# Altium PCB N-watch_3.1.PcbDoc
Units mil, origin at the board's own origin, x right, y up, seen from the top; angles counter-clockwise.
Board outline 1400 x 1375 mil, 2 copper layers (Top Layer, Bottom Layer); 47 components, 47 nets, 212 pads, 99 vias.
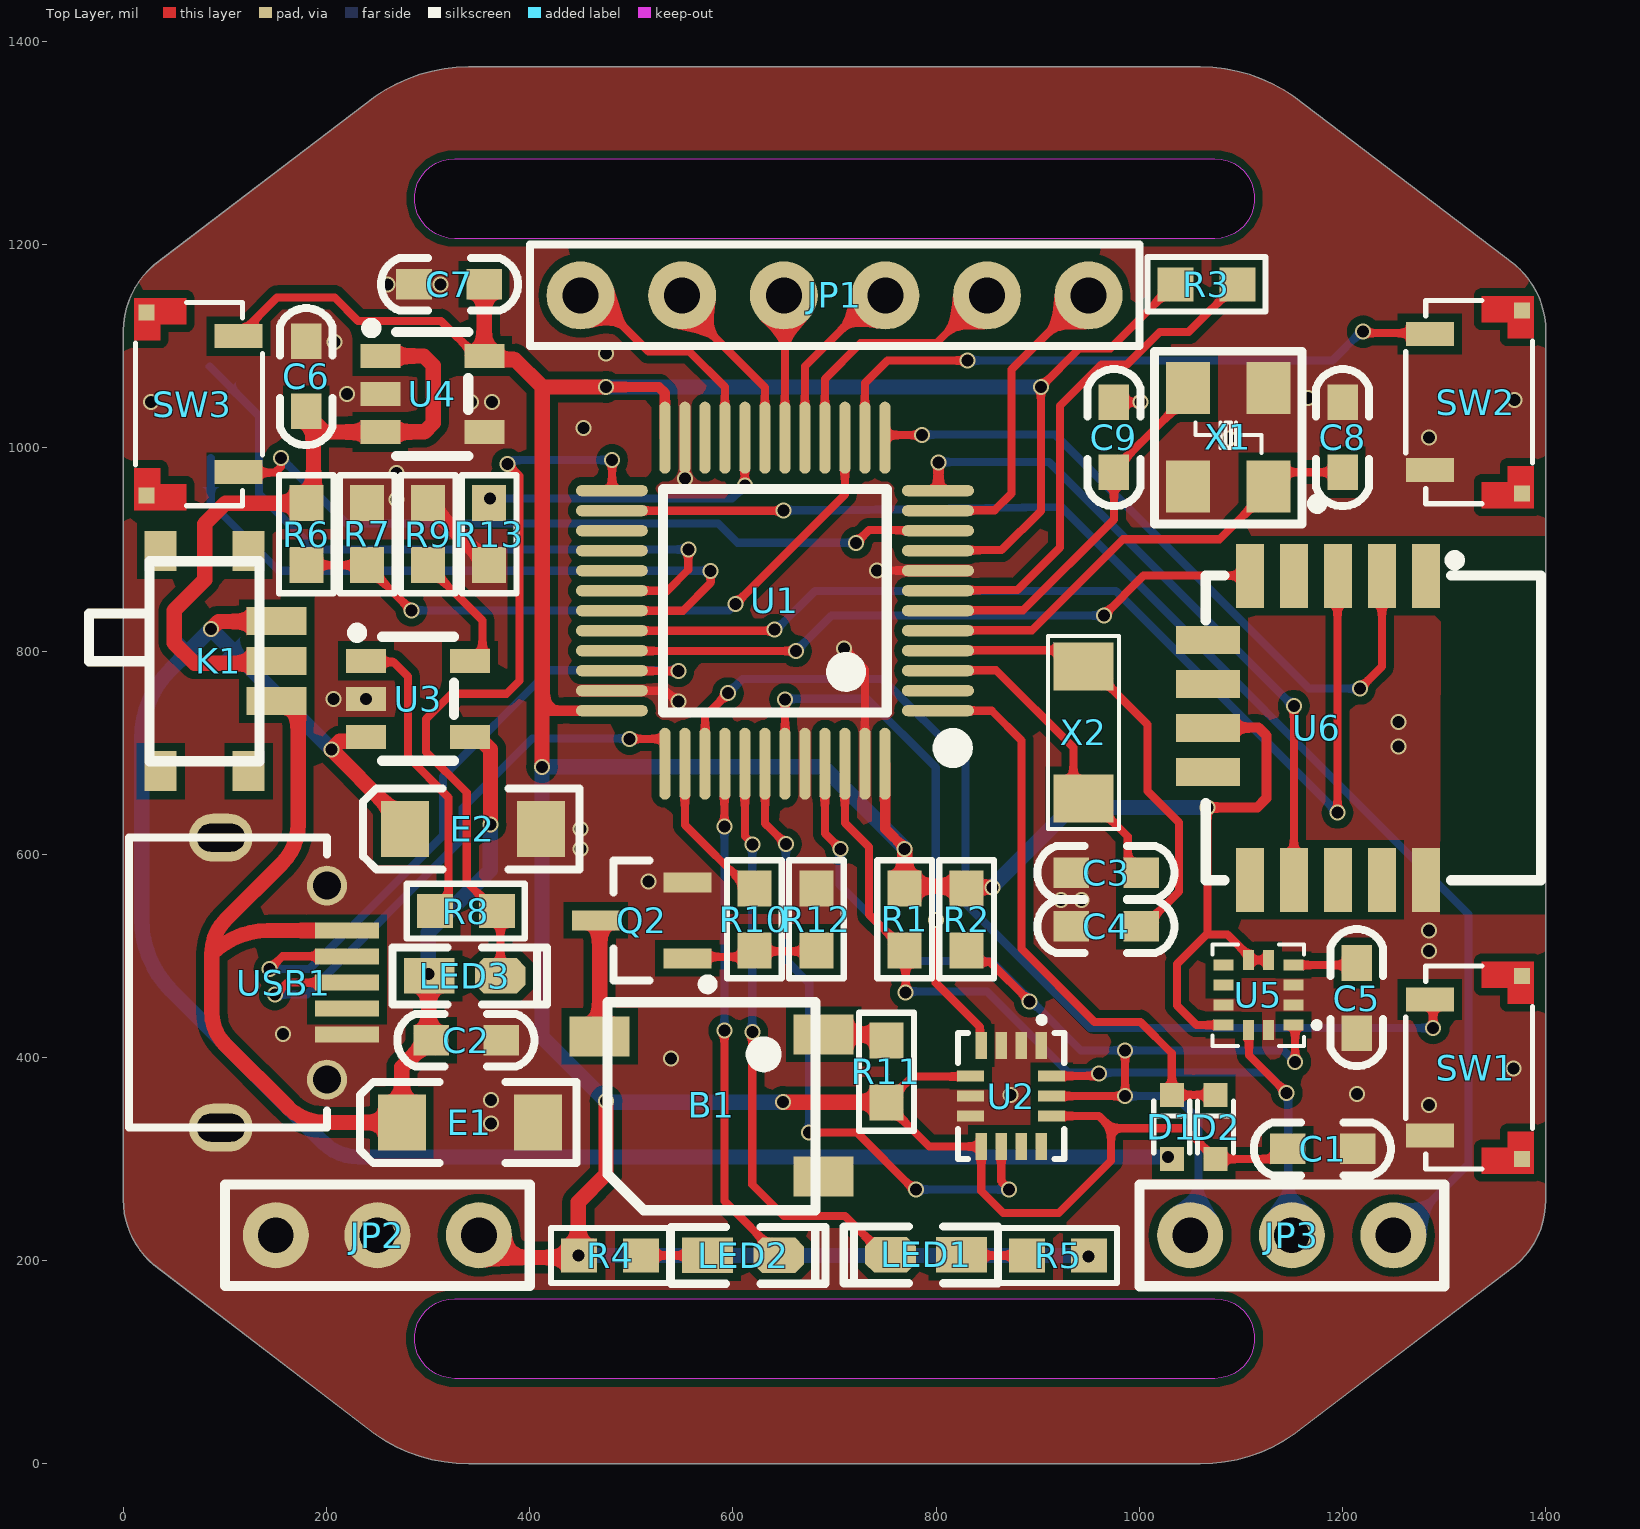
[diagram p0: Top Layer view]
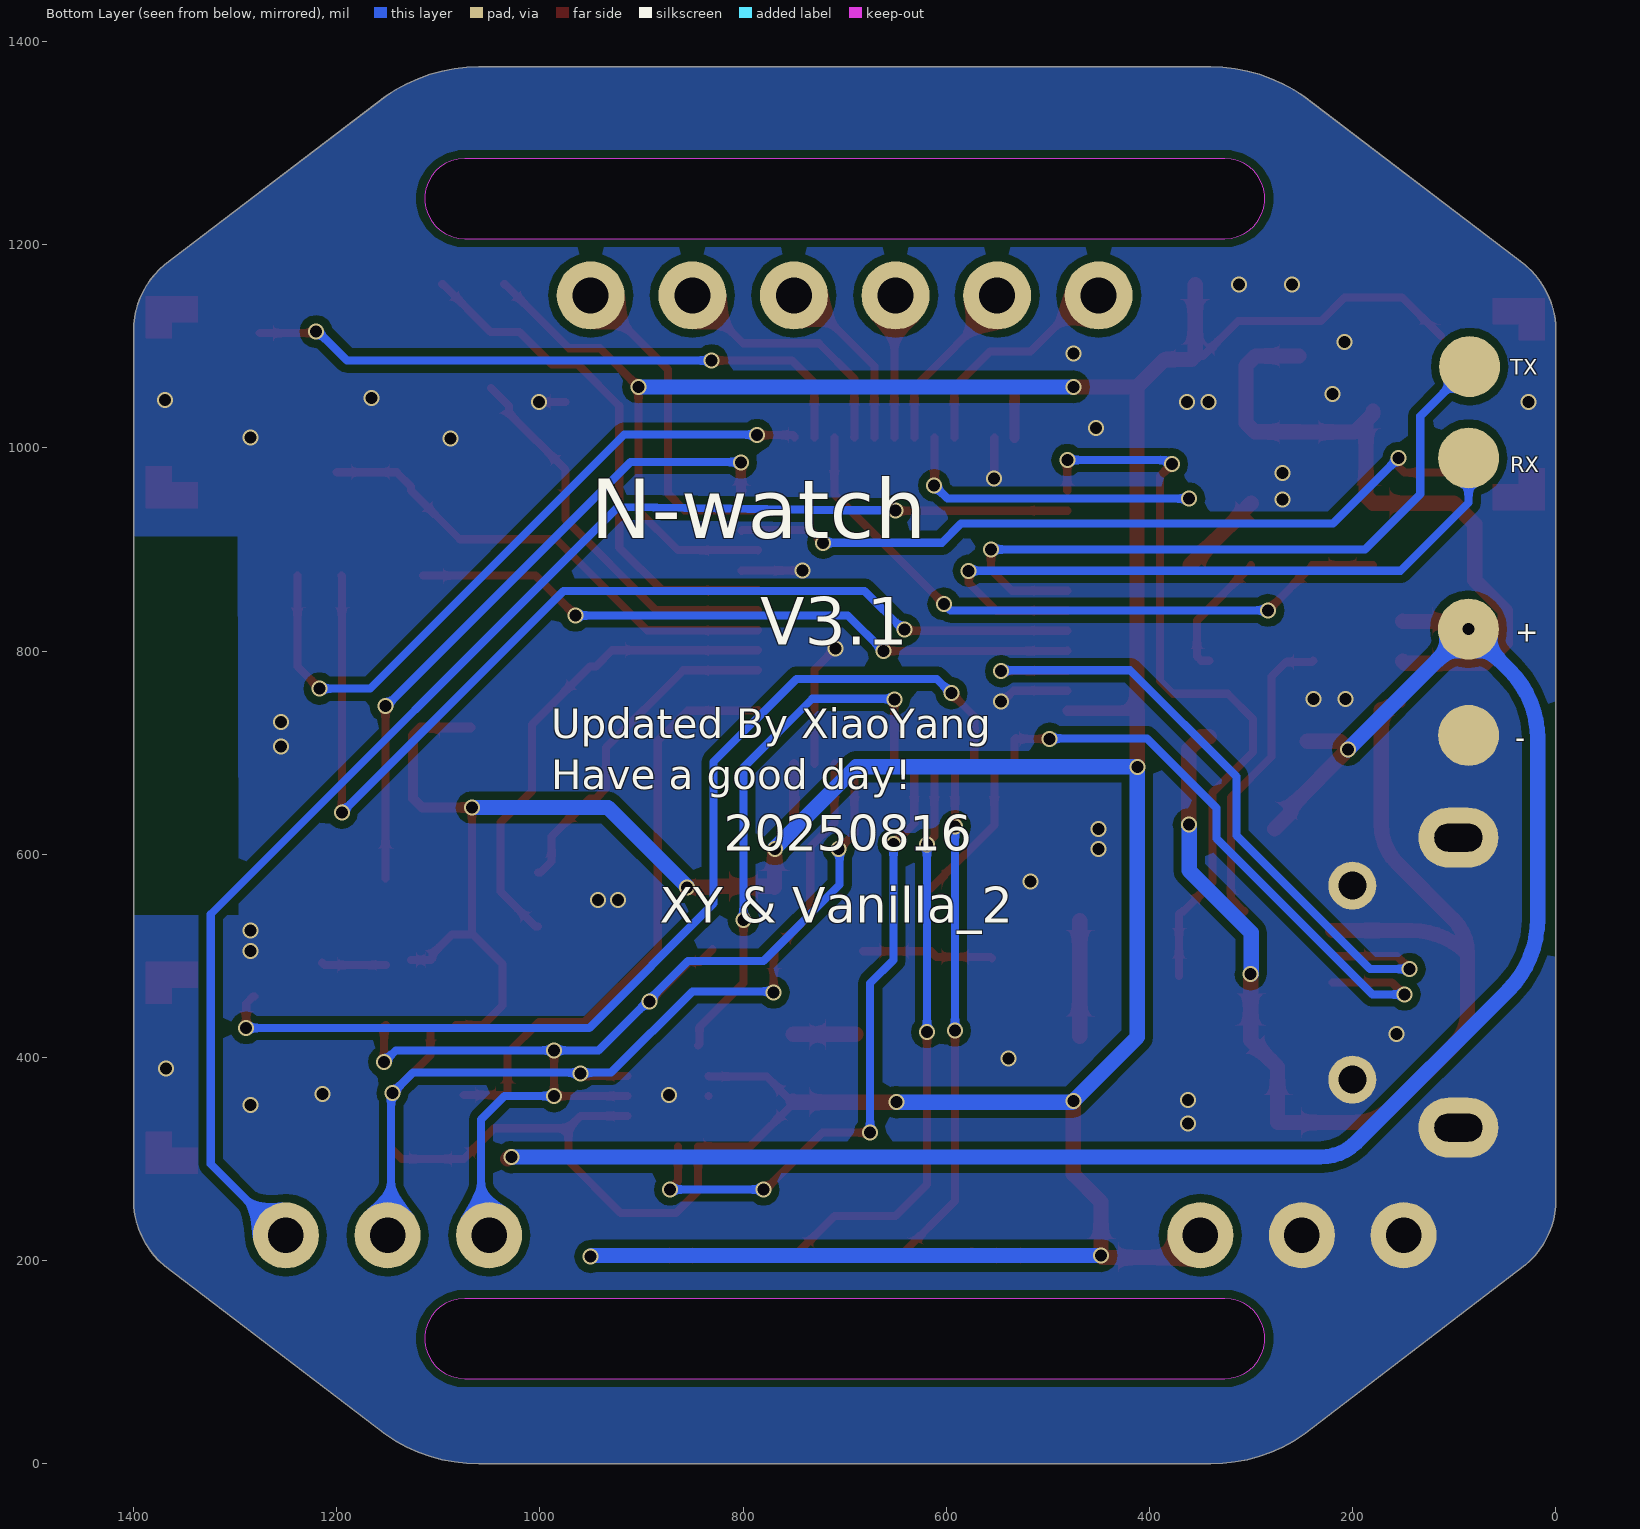
[diagram p1: Bottom Layer view, seen from below]

## Layer stack, top to bottom
Top Solder: solder mask 0.4, Solder Resist, Dk 3.5
Top Layer: signal copper 1.4
Dielectric 1: dielectric 12.6, FR-4, Dk 4.8
Bottom Layer: signal copper 1.4
Bottom Solder: solder mask 0.4, Solder Resist, Dk 3.5

## Board outline
29.92,195.84 248.23,28.94 ccw(c340,160) 340,0 1060,0 ccw(c1060,160) 1151.77,28.94 1369.64,194.89 ccw(c1315,260) 1400,260 1400,1115 ccw(c1315,1115) 1369.64,1180.11 1151.77,1346.06 ccw(c1060,1215) 1060,1375 340,1375 ccw(c340,1215) 248.23,1346.06 30.36,1180.11 ccw(c85,1115) 0,1115 0,260 ccw(c83.76,260)
cut-out: 325.98,1206 cw(c325.98,1245.37) 325.98,1284.74 1074.02,1284.74 cw(c1074.02,1245.37) 1074.02,1206
cut-out: 325.98,84 cw(c325.98,123.37) 325.98,162.74 1074.02,162.74 cw(c1074.02,123.37) 1074.02,84

## Design rules (kind name [scope] priority, off if disabled: settings)
Clearance Clearance_1 [OnLayer('Mechanical 1') vs InPolygon] p1: gap=50 ignorepadtopadclearanceinfootprint=FALSE
Clearance [All] p2: gap=8 ignorepadtopadclearanceinfootprint=FALSE
ComponentClearance [All] p1: gap=0 collisioncheckmode=3 verticalgap=100000 showdistances=FALSE
HoleSize [All] p1: absolutevalues=TRUE maxlimit=100 minlimit=0 maxpercent=80.000 minpercent=20.000
HoleToHoleClearance [All] p1: gap=5 allowstackedmicrovias=TRUE
MinimumSolderMaskSliver [All] p1: minsoldermaskwidth=3
PlaneConnect [All] p1: planeconnectstyle=Direct reliefexpansion=20 reliefentries=4 reliefconductorwidth=10 reliefairgap=10
PolygonConnect [All] p1: connectstyle=Direct reliefconductorwidth=10 reliefentries=4 polygonreliefangle="90 Angle" airgapwidth=10
RoutingVias [All] p1: holewidth=13 width=20 viastyle="Through Hole" minholewidth=10 minwidth=10 maxholewidth=100 maxwidth=100
SilkToSilkClearance [All] p1: silktosilkclearance=0
SilkToSolderMaskClearance SilkToSolderMaskClearance_1 [IsPad] p1: minsilkscreentomaskgap=10 clearancetoexposedcopper=TRUE
SilkToSolderMaskClearance [IsPad] p2: minsilkscreentomaskgap=1 clearancetoexposedcopper=TRUE
SolderMaskExpansion [All] p1: expansion=4 istentingtop=FALSE
Width [All] p1: maxlimit=200 minlimit=8 preferedwidth=10 minimp=50.000000 maximp=50.000000 favimp=50.000000
23 further rules are at their usual default settings.

## Components (designator, comment, footprint, x,y, rotation, side; value= is the part's Value field where it differs from the comment)
B1 "DC5V" 蜂鸣器5020 579.02,351.94 r180 top
C1 "0.1uf" "C 0603" 1180,310 r180 top
C2 "1uf" "C 0603" 337.02,416.94 r180 top
C3 "22pf" "C 0603" 967.02,581.94 r180 top
C4 "22pf" "C 0603" 967.02,528.94 r180 top
C5 "0.1uf" "C 0603" 1214.02,458.94 r90 top
C6 "1uf" "C 0603" 180,1070 r270 top
C7 "1uf" "C 0603" 321.02,1160.94 r0 top
C8 "22pf" "C 0603" 1200,1010 r270 top
C9 "22pf" "C 0603" 975,1010 r270 top
D1 "IN4148WT" IN4148WT 1070.89,282 r90 top
D2 "IN4148WT" IN4148WT 1114,282 r90 top
E1 "47uf" "CD A(3216)" 341.02,335.94 r0 top
E2 "10uF/6.3V" "CD A(3216)" 344.02,624.94 r0 top
JP1 "HDR-1X6" HDR-1X6 950,1150 r180 top locked
JP2 "HDR-1X3" OLED_3PIN#1 400,275 r180 top locked
JP3 "HDR-1X3" OLED_3PIN#2 1305.06,289.85 r180 top locked
K1 "SS_12F23" SS_12F23 80,790 r270 top
LED1 "红色" "LED 0603G" 790,206 r180 top locked
LED2 "红色" "LED 0603G" 610,205 r0 top locked
LED3 "红色" "LED 0603G" 336.02,479.94 r0 top
Q2 "BC817" SOT23-3N 510,535 r90 top
R1 "4.7K" R0603_M 769,536 r90 top
R2 "4.7K" R0603_M 830,536 r90 top
R3 "10K" R0603_M 1066,1161 r180 top
R4 "10K" R0603_M 479,205 r180 top locked
R5 "10K" R0603_M 920,205 r0 top locked
R6 "100K" R0603_M 180,915 r90 top
R7 "100K" R0603_M 240,915 r270 top
R8 "1K" R0603_M 337.02,543.94 r0 top
R9 "10K" R0603_M 300,915 r270 top
R10 "1K" R0603_M 621,536 r90 top
R11 "22" R0603_M 751.02,385.94 r270 top
R12 "10K" R0603_M 682,536 r270 top
R13 "10K" R0603_M 360,915 r90 top
SW1 "3x6x5" SB-2*4*3.5 1337,390 r270 top
SW2 "3x6x5" SB-2*4*3.5 1337,1045 r270 top
SW3 "3x6x5" SB-2*4*3.5 62,1043 r90 top
U1 "STM32F103C8T6" "LQFP48 7X7_N" 641.27,849.55 r90 top
U2 "LSM6DSM" LSM6DSM 871.02,359.94 r270 top
U3 "XT4054K421MR-G" SOT-23-5_L3.0-W1.7-P0.95-LS2.8-BR 290,755 r180 top
U4 "TPS78233DDCT" SOT-23-5_L3.0-W1.7-P0.95-LS2.8-BR 304.02,1054.94 r180 top
U5 "LIS3MDLTR" LIS3MDLTR 1172.5,433.43 r90 top
U6 "DX-BT24-T" DX-BT24-T 1065.94,870.5 r270 top
USB1 "USB-5P" MICRO-USB 200.35,473.66 r90 top
X1 "8M" XTAL-3225 1125,965 r180 top
X2 "32.768 kHz" XTAL-3215 945,720 r90 top

## Footprints (in the part's own frame and the unit in brackets; to place one, negate y for a bottom-side part, rotate by r counter-clockwise, add the part's x,y. Pads: shape width x height; smd on the part's side, far side on the other; paste and mask are expansions set on the pad)
"C 0603" [mil] "无极性贴片电容"
  rect 35x30 smd: 1(-35,0) 2(34,0)
  silkscreen extent -67,-26 67,26, body extent -31,-16 31,16, height 32
"CD A(3216)" [mm] "长3.2mm，宽1.6mm，厚1.6mm"
  rect 1.2x1.4 smd: 1(-1.7,0) 2(1.7,0)
  silkscreen extent -2.74,-1.02 2.67,1.02, body extent -1.6,-0.8 1.6,0.8, height 1.6
DX-BT24-T [mm]
  rect 1.6x0.7 smd paste+0 mask+0.05: 1(-0.089,5.488) 2(-0.089,4.388) 3(-0.089,3.288) 4(-0.089,2.188) 5(-0.089,1.088) 10(7.511,1.088) 11(7.511,2.188) 12(7.511,3.288) 13(7.511,4.388) 14(7.511,5.488)
  rect 0.7x1.6 smd paste+0 mask+0.05: 6(1.511,0.038) 7(2.611,0.038) 8(3.711,0.038) 9(4.811,0.038)
  silkscreen extent -0.61,-0.01 7.52,8.37
HDR-1X6 [mm] "排针，6脚"
  round 1.7 hole 0.9: 1(0,0) 2(2.54,0) 3(5.08,0) 4(7.62,0) 5(10.16,0) 6(12.7,0)
  silkscreen extent -1.27,-1.27 13.97,1.27, body extent -1.27,-1.27 13.97,1.27, height 8.5
IN4148WT [mm]
  rect 0.6x0.6 smd paste+0 mask+0.051: 1(0.457,0.991) 2(2.057,0.991)
  silkscreen extent 0.61,0.54 1.91,1.44
"LED 0603G" [mil] "绿色0603LED"
  rect 50x35 smd: 1(-35,0.26)
  oct 50x35 smd: 2(35,0.26)
  silkscreen extent -71,-28 81,28, body extent -31,-16 32,16, height 24
LIS3MDLTR [mm]
  rect 0.28x0.5 smd paste+0 mask+0.051: 1(-0.04,0.53) 2(0.46,0.53) 3(0.96,0.53) 4(1.46,0.53) 7(1.46,2.28) 8(0.96,2.28) 9(0.46,2.28) 10(-0.04,2.28)
  rect 0.5x0.28 smd paste+0 mask+0.051: 5(1.585,1.155) 6(1.585,1.655) 11(-0.165,1.655) 12(-0.165,1.155)
  silkscreen extent -0.56,-0.13 1.98,2.55
"LQFP48 7X7_N" [mm] "48脚，体宽7x7mm，脚距0.5mm"
  oval 0.279x1.8 smd: 1(-2.75,-4.075) 2(-2.25,-4.075) 3(-1.75,-4.075) 4(-1.25,-4.075) 5(-0.75,-4.075) 6(-0.25,-4.075) 7(0.25,-4.075) 8(0.75,-4.075) 9(1.25,-4.075) 10(1.75,-4.075) 11(2.25,-4.075) 12(2.75,-4.075) 25(2.75,4.075) 26(2.25,4.075) 27(1.75,4.075) 28(1.25,4.075) 29(0.75,4.075) 30(0.25,4.075) 31(-0.25,4.075) 32(-0.75,4.075) 33(-1.25,4.075) 34(-1.75,4.075) 35(-2.25,4.075) 36(-2.75,4.075)
  oval 1.8x0.279 smd: 13(4.075,-2.75) 14(4.075,-2.25) 15(4.075,-1.75) 16(4.075,-1.25) 17(4.075,-0.75) 18(4.075,-0.25) 19(4.075,0.25) 20(4.075,0.75) 21(4.075,1.25) 22(4.075,1.75) 23(4.075,2.25) 24(4.075,2.75) 37(-4.075,2.75) 38(-4.075,2.25) 39(-4.075,1.75) 40(-4.075,1.25) 41(-4.075,0.75) 42(-4.075,0.25) 43(-4.075,-0.25) 44(-4.075,-0.75) 45(-4.075,-1.25) 46(-4.075,-1.75) 47(-4.075,-2.25) 48(-4.075,-2.75)
  silkscreen extent -3.93,-4.69 2.79,2.79, body extent -4.5,-4.5 4.5,4.5, height 1.45
LSM6DSM [mm]
  rect 0.675x0.28 smd paste+0 mask+0.051: 1(-1.314,0.822) 2(-1.314,0.322) 3(-1.314,-0.178) 4(-1.314,-0.678) 8(1.21,-0.678) 9(1.21,-0.178) 10(1.21,0.322) 11(1.21,0.822)
  rect 0.28x0.675 smd paste+0 mask+0.051: 5(-0.552,-0.94) 6(-0.052,-0.94) 7(0.448,-0.94) 12(0.448,1.085) 13(-0.052,1.085) 14(-0.552,1.085)
  silkscreen extent -2.03,-1.25 1.52,1.4
MICRO-USB [mm]
  rect 0.4x1.6 smd: 1(1.3,-0.5) 2(0.65,-0.5) 3(0,-0.5) 4(-0.65,-0.5) 5(-1.3,-0.5)
  oval 1.2x1.6 / inner oval 1.5x2 / far side oval 1.5x2 hole 0.7 slot 1.2 at 90 deg: 6(-3.625,2.65) 6(3.625,2.65)
  round 1 / inner round 1 / far side round 1.2 hole 0.7: 6(-2.425,0) 6(2.425,0)
  silkscreen extent -3.62,0 3.62,4.95, body extent -4.1,-0.23 4.1,5.2, height 2.68
OLED_3PIN#1 [mil]
  round 65 hole 35: 1(50,50) 2(150,50) 3(250,50)
  silkscreen extent 0,0 300,100
OLED_3PIN#2 [mil]
  round 65 hole 35: 1(55,65) 2(155.06,64.85) 3(255.06,64.85)
  silkscreen extent 5,15 305,115
R0603_M [mm] "1/10W贴片电阻"
  rect 0.9x0.85 smd: 1(-0.775,0) 2(0.775,0)
  silkscreen extent -1.48,-0.69 1.48,0.69, body extent -0.8,-0.4 0.8,0.4, height 0.4
SB-2*4*3.5 [mm] "贴片侧贴轻触开关"
  rect 0.4x0.4 smd: 0(-2.286,1) 0(2.286,1)
  rect 0.6x1.2 smd: 1(-1.7,-1.3) 2(1.7,-1.3)
  Top Layer region: -2.65,0 -2.65,1.3 -1.6,1.3 -1.6,0.65 -2,0.65 -2,0
  Top Layer region: 2.65,0 2.65,1.3 1.6,1.3 1.6,0.65 2,0.65 2,0
  silkscreen extent -2.54,-1.9 2.54,1.27, body extent -2.27,-1.5 2.27,2.29, height 1.8
SOT23-3N [mm] "3x1.3x1mm(长宽高)"
  rect 0.5x1.2 smd: 1(-0.95,-1.143) 2(0.95,-1.143) 3(0,1.143)
  silkscreen extent -1.72,-1.78 1.5,0.7, body extent -1.5,-1.2 1.5,1.2, height 1.05
SOT-23-5_L3.0-W1.7-P0.95-LS2.8-BR [mm]
  rect 1x0.6 smd: 1(1.3,-0.899) 2(1.3,0.05) 3(1.3,1) 4(-1.3,1.001) 5(-1.3,-0.899)
  silkscreen extent -0.9,-1.73 1.65,1.6
SS_12F23 [mm] "七脚小拨动开关"
  rect 1x0.8 smd: 0(-2.75,1.1) 0(-2.75,-1.1) 0(2.75,1.1) 0(2.75,-1.1)
  rect 0.7x1.5 smd: 1(1,1.8) 2(0,1.8) 3(-1,1.8)
  silkscreen extent -2.5,-2.9 2.5,1.38, body extent -2.97,-2.96 3.03,2.24, height 1.4
XTAL-3215 [mm]
  rect 1.2x1.5 smd: 1(-1.65,0) 2(1.65,0)
  silkscreen extent -2.41,-0.89 2.41,0.89, body extent -1.6,-0.75 1.6,0.75, height 0.81
XTAL-3225 [mil]
  rect 43.31x51.18 smd: 1(-2,3) 2(-2,-94) 3(77,-94) 4(77,3)
  silkscreen extent -55,-130 110,40, body extent -13,-108 85,18, height 31
蜂鸣器5020 [mm] "无源蜂鸣器"
  rect 1.5x1 smd: 1(-2.8,-1.8) 2(2.8,-1.75) 3(-2.8,1.75)
  silkscreen extent -2.6,-2.6 2.6,2.6, body extent -2.6,-2.63 2.6,2.57, height 2

## Part data
B1: library part BEEP, "蜂鸣器", BOM名称=蜂鸣器, 学习资源=https://lmdzstyle.taobao.com/, 版权归属=黎明电子style
C1 C2 C5 C6 C7: library part C, "无极性贴片电容", BOM名称=无极性贴片电容, 学习资源=https://lmdzstyle.taobao.com/, 版权归属=黎明电子style
C3 C4 C8 C9: library part C, "贴片电容/MLCC电容", BOM名称=无极性贴片电容, 当前库版本V2022.11.14 @淘宝卖家:黄晶宝石=最新版本发布https://shop463601444.taobao.com
E1 E2: library part C-CD, "贴片钽电容", BOM名称=贴片钽电容, 学习资源=https://lmdzstyle.taobao.com/, 版权归属=黎明电子style
JP1: library part "Header 6", "6P接插件", BOM名称=6P接插件, 学习资源=https://lmdzstyle.taobao.com/, 版权归属=黎明电子style
JP2 JP3: library part "Header 3", "3P接插件", BOM名称=3P接插件, 学习资源=https://lmdzstyle.taobao.com/, 版权归属=黎明电子style
LED1 LED2 LED3: library part LED-SMD, "贴片LED", BOM名称=贴片LED, 学习资源=https://lmdzstyle.taobao.com/, 版权归属=黎明电子style
Q2: library part 8050-SMD, "高频放大-NPN型", BOM名称=高频放大-NPN型, 学习资源=https://lmdzstyle.taobao.com/, 属性="40V 1.5A 1W 100MHZ", 版权归属=黎明电子style
R1 R2 R3 R4 R5 R6 R7 R8 R9 R10 R11 R12 R13: library part R, "贴片电阻", BOM名称=贴片电阻, 联系下单店铺卖家 免费帮你查找封装="联系下单店铺卖家 免费技术支持"
SW1 SW2 SW3: library part "TSW 3x6", "3x6轻触开关", BOM名称=3x6轻触开关, 学习资源=https://lmdzstyle.taobao.com/, 版权归属=黎明电子style
U1: "Flaah:64/RAM:20/IO:36", 学习资源=https://lmdzstyle.taobao.com/, 版权归属=黎明电子style
USB1: "微型USB母座", BOM名称=微型USB母座, 学习资源=https://lmdzstyle.taobao.com/, 版权归属=黎明电子style
X1: library part XTAL-4, "4脚晶振", BOM名称=4脚晶振, 学习资源=www.ooocke.com, 版权归属=源创客
X2: library part XTAL, "Crystal Oscillator", LatestRevisionDate=17-Jul-2002, LatestRevisionNote="Re-released for DXP Platform.", PackageDescription="Crystal, Thru-Hole; 2 Leads; Body 3.1 x 8.2 mm (Dia.xH)", PackageReference=R38, Published=8-Jun-2000, Publisher="Altium Limited"

## Free pads (board coordinates)
  round 60 smd far side: 2(85,1080) 2(86,990) 2(86.11,821.54) 3(86.02,716.94)

## Via types
v1: diameter 15.75, hole 11.81, Top Layer to Bottom Layer, tented both sides, 99 vias

## Nets (pads, with @x,y where several pads share a name; then routed paths per layer and width w, separated by ;. In a path a pad name is that pad's centre, name@x,y a point inside that pad or via, vN(x,y) a via of type N, cw(c..) or ccw(c..) an arc to the next point about the centre after c; other vN are vias at no path point)
+3V3: C1.2 C7.2 D2.1 JP2.1 R1.2 R2.2 R3.2 R4.2 R5.2 R11.2 SW3.2 U1.9 U1.24 U1.36 U1.48 U2.5 U2.8 U2.12 U4.5 U5.5 U5.6 U5.10 U6.8 | length 5353
  Top Layer w8: SW3.2 151.25,1148 208,1148 231,1125 312.67,1125 347.32,1090.35 U4.5 ; C7.2 C7.2@355.11,1160.85 ; U4.5@355.11,1090.44 U4.5 ; U4.5@358.53,1087.02 U4.5 ; R11.2@751.02,354.45 793.16,312.31 U2.8 844.34,268.66 866,247 920.66,247 972,298.34 972,330.37 ; R11.2@751.8,356.22 776.75,381.17 833.49,381.17 U2.5 ; U1.9@785.45,899.21 785.57,899.34 864.34,899.34 903,938 v1(903,1060) 941,1098 971.51,1098 1034.51,1161 R3.2 ; U2.12 960.06,342.31 972,330.37 ; v1(1067,646) 1067,522 ; U5.10 1056.13,431.87 1037,451 1037,492 1067,522 ; U5.6 U5.6@1108.07,495.84 ; U5.5 U5.6@1108.07,495.84 ; C1.2 1136,300 D2.1 1044.63,330.37 972,330.37 ; 1067,522 1067,520.93 1086.56,520.94 1105.82,501.69 1105.82,498.09 U5.6@1108.07,495.84
  Top Layer w10: 412,741.28 412.26,741.28 U1.36 ; v1(475,1059.94) 526.95,1059.94 532.81,1054.09 532.81,1010.19 U1.24 ; U1.48@749.86,688.76 749.86,625.14 v1@768.85,606.15 ; v1(1067,646) 1116,646 1125,655 1125,717 1117.39,724.61 U6.8@1068.43,724.61
  Top Layer w15: JP2.1 350.74,225 372.74,203 446.49,203 R4.2 ; U4.5@355.11,1090.44 C7.2@355.11,1160.85 ; U4.5@358.53,1087.02 385.19,1087.02 412,1060.21 412.26,1059.94 ; v1(412,686) 412,741.02 412.26,741.28 412.26,1059.94 ; v1(447.75,205) 447.75,257.75 475,285 v1(475,357) ; v1(475,1059.94) 412.26,1059.94 ; v1(649,356) 750.02,356 R11.2@751.02,357 ; v1(768.85,605.15) 769.02,604.98 R1.2@769.02,567.45 ; R1.2@769.02,568.45 R2.2@830.02,568.45 ; R2.2@830.02,567.45 v1(855.45,567.45)
  Bottom Layer w15: v1(447.75,205) v1@949,205 ; v1(475,1059.94) 475.06,1060 v1(903,1060) ; v1(649,356) 476,356 v1(475,357) 412,420 v1(412,686) 689,686 v1@768.85,606.15 ; v1@855.45,568.45 933,646 v1(1067,646)
  other v1: 950,204
+5V0: C2.2 E1.1 K1.1 LED3.1 U3.4 USB1.1 | length 1162.9
  Top Layer w8: 87.01,444.33 87.02,444.41 ; K1.1@151.88,748.57 165.74,748.57 K1.1@172.02,742.29 ; 196.52,336.44 197.02,335.94 ; C2.2@300.52,416.94 C2.2 C2.2@300.49,419.47 ; v1(300.49,481.94) 300.49,480.73 LED3.1
  Top Layer w15: 87.02,444.33 ccw(c131.4,444.33) 100.01,412.94 162.37,350.59 ccw(c196.51,384.73) 196.52,336.44 ; 87.02,444.41 87.02,501.94 ; K1.1@172.02,742.29 172.02,629.57 cw(c117.39,629.57) 156.07,591 101.12,536.05 ccw(c135.3,501.94) 87.02,501.94 ; 197.02,335.94 E1.1 274.09,390.52 C2.2@300.52,416.94 ; USB1.1 142.29,524.84 ccw(c142.29,446.66) 87.02,501.94 ; C2.2@300.49,419.47 LED3.1@300.49,480.73 ; U3.4 349.05,715.61 361.39,703.27 v1(361.39,629.13)
  Bottom Layer w8: v1@300.02,482.42 v1(300.49,481.94)
  Bottom Layer w15: v1@300.02,482.42 300.02,522.94 361.02,583.94 361.02,627.94 361.39,628.32 v1(361.39,629.13)
adc_bat: C6.2 K1.2 R6.2 U4.1 U4.3 | length 683.3
  Top Layer w8: U4.3@252.64,1015.75 U4.3
  Top Layer w15: K1.2 148.87,788 70,788 50,808 50,840 80,870 80,925 100.51,945.51 R6.2 187,952.51 C6.2@187,1026.5 ; C6.2 180,1033.5 C6.2@187,1026.5 ; U4.3@252.64,1015.75 296.23,1015.75 305.02,1024.54 305.02,1080.94 295.6,1090.36 U4.1 ; U4.3 197.94,1015.56 C6.2@187,1026.5
BOOT1: R13.2 U1.20 | length 303.7
  Top Layer w8: U1.20 611.53,1009.79 611.53,963.47 v1(612,963)
  Bottom Layer w8: v1(361,950) 599,950 v1(612,963)
BUZZER: R10.2 U1.38 | length 154.4
  Top Layer w8: U1.38 552.68,628.81 614.98,566.51 R10.2
charge_det: LED3.2 R8.2 U1.25 | length 737.9
  Top Layer w8: R8.2 366.54,543.94 338,572.48 338,660.63 298,700.63 298,733 323,758 377,758 389.73,770.73 389.73,972.15 v1(378,983.89) ; LED3.2 R8.2@371.02,541.45 ; U1.25 481,958 v1(481,988)
  Bottom Layer w8: v1@380.1,984 384.1,988 v1(481,988)
ESP_LINK: U1.32 U6.3 | length 1054.2
  Top Layer w8: U1.32 640,820 v1(641,821) ; v1(1195,641) 1195,873.83 U6.3@1195.39,874.21
  Bottom Layer w8: v1(641,821) 642.43,821 680.64,859.21 976.79,859.21 v1(1195,641)
ESP_RST: U1.33 U6.5 | length 665.1
  Top Layer w8: U1.33 481.16,800 v1(662,800) ; v1(965,835) 1004.21,874.21 U6.5@1115.08,874.21
  Bottom Layer w8: v1(662,800) 697,835 v1(965,835)
ESP_RXD: U1.13 U6.2 | length 693
  Top Layer w8: U1.13 749.54,1011.17 750.92,1012.55 v1(786.27,1012.55) ; v1(1217,763) 1238.69,784.69 U6.2 U6.2@1238.69,874.21
  Bottom Layer w8: v1@786.27,1013 917,1013 1167,763 v1(1217,763)
ESP_TXD: U1.12 U6.11 | length 647.1
  Top Layer w8: U6.11@1152,576.08 v1(1152,746)
  Top Layer w10: U1.12 801.81,957.82 802.27,958.28 v1(802.27,985.55)
  Bottom Layer w8: v1@802.27,986 911,986 1151,746 v1(1152,746)
GND: C1.1 C2.1 C3.2 C4.2 C5.1 C6.1 C7.1 C8.1 C9.1 E1.2 E2.2 JP2.2 JP2.3 pad.3 Q2.2 R7.1 R9.1 R12.1 R13.1 SW1.2 SW2.2 U1.8 U1.23 U1.35 U1.44 U1.47 U2.1 U2.2 U2.3 U2.6 U2.7 U3.2 U4.2 U4.4 U5.2 U5.3 U5.9 U5.12 U6.14 USB1.5 USB1.6 X1.2 X1.4 | length 404.2
  Top Layer w8: U1.35 533.96,760.97 544.37,750.55 v1(546.27,750.55) ; U1.23 552.84,1009.84 552.84,970.03 v1(553,969.87) ; v1(709.27,802.55) 729.85,781.97 U1.47 ; v1(741.5,879.31) 801.48,879.31 U1.8 ; C9.1 v1(1001,1045)
  Top Layer w15: R9.1 309.23,936.28 309.23,935.25 R13.1
  other v1: 362,335 1285,353 362,358 873,363 1214,364 1368,389 539,399 157,423 1285,505 1285,525 923,555 943,555 517,573 450,605 450,625 1255,706 1255,730 207,753 238.82,753.01 269,949 269,975 1088,1009 1285,1010 452.83,1019.45 27,1045 342,1045 363,1045 1369,1047 1166,1049 220,1053 475,1093 208,1104 259.96,1160.56 312,1161
INT1: U1.43 U2.4 | length 532.4
  Top Layer w8: v1(651.27,752.55) 651.27,689.26 U1.43 U1.43@651.3,688.91 ; v1(799.63,535.27) 799.63,473.37 842.94,430.06 842.94,413.07 U2.4
  Bottom Layer w8: v1@651.27,753 732,753 799.63,685.37 v1(799.63,535.27)
INT2: U1.42 U2.9 | length 646.7
  Top Layer w8: U1.42 631.62,688.91 631.62,630.38 637.88,624.12 v1(652,610) ; v1(675,326) 721.96,326 777.96,270 v1(780,270) ; U2.9 864.02,278.21 871.84,270.39 v1(871.84,270.02)
  Bottom Layer w8: v1(652,610) 652,496 675,473 v1(675,326) ; v1(780,270) v1(871.84,270.02)
KEY1: SW1.1 U1.39 | length 1035.3
  Top Layer w8: U1.39@572.56,689.63 572.56,735.84 595,758.28 v1(595,758.5) ; SW1.1@1280.83,459.87 1282.3,459.87 1289.11,453.06 v1(1289.11,429.04)
  Bottom Layer w8: v1(595,758.5) 595.3,758.5 609.45,772.66 747.34,772.66 829,691 829,551.46 951.42,429.04 v1@1287.11,429.04
KEY2: SW2.1 U1.14 | length 619.4
  Top Layer w8: U1.14 729.85,1063.85 752,1086 v1(831,1086) ; v1(1220.33,1114.39) 1221.85,1112.87 SW2.1@1275.83,1112.87
  Bottom Layer w8: v1(831,1086) 1189.94,1086 v1@1218.33,1114.39
KEY3: SW3.1 U1.10 | length 742.1
  Top Layer w8: SW3.1@111.64,975.57 149.21,975.57 155,981.35 v1(155,990) ; v1(721.27,906.55) 733.72,919 801.17,919 U1.10
  Bottom Layer w8: v1(155,990) 219.5,925.5 585.5,925.5 604.45,906.55 v1@722.29,906.55
LED_BULE: LED2.2 U1.40 | length 505.9
  Top Layer w8: v1(591.48,426.48) 591.48,258.69 643.91,206.26 LED2.2@645,206.26 ; v1(591.48,627.48) 591.48,688.53 U1.40
  Bottom Layer w8: v1(591.48,426.48) v1(591.48,627.48)
LED_RED: LED1.2 U1.41 | length 581.6
  Top Layer w8: U1.41 611.74,617.74 619.27,610.21 v1(619.27,609.55) ; v1(619,425) 619,275 650,244 710.24,244 747.5,206.74 LED1.2@755,206.74
  Bottom Layer w8: v1(619,425) 619,609.28 v1(619.27,609.55)
NetB1_1: B1.1 R11.1 | length 61.9
  Top Layer w8: R11.1@750.65,422.81 R11.1@751.02,422.44
  Top Layer w15: B1.1 R11.1@750.65,422.81
NetB1_2: B1.2 Q2.3 | length 115.6
  Top Layer w8: Q2.3@468.78,534.71 Q2.3@470.02,535.94
  Top Layer w15: B1.2 Q2.3@468.78,534.71
NetC5_2: C5.2 U5.4 | length 63.7
  Top Layer w8: U5.4 1211.99,490.92 C5.2 C5.2@1214.32,493.25
NetD1_2: D1.2 D2.2 U1.1 | length 612.6
  Top Layer w8: U1.1@785.45,741.73 785.88,741.3 U1.1@801.72,741.3 ; D2.2 D1.2 1031.89,404.11 1001,435 956,435 884,507 884,712 854.72,741.28 U1.1@823.7,741.28 ; U1.1@801.72,741.3 U1.1@823.7,741.3 ; U1.1 U1.1@823.7,741.28
NetLED1_1: LED1.1 R5.1 | length 64.8
  Top Layer w8: LED1.1@825.74,205 R5.1
  Top Layer w10: LED1.1 LED1.1@825.74,205
NetLED2_1: LED2.1 R4.1 | length 65.6
  Top Layer w8: R4.1@509.64,205.13 LED2.1@574.88,205.13
  Top Layer w15: R4.1 R4.1@509.64,205.13 ; LED2.1@574.88,205.13 LED2.1
NetQ2_1: Q2.1 R10.1 R12.2 | length 129.9
  Top Layer w8: Q2.1 556.4,499 609.51,499 615.01,504.49 R12.2@682,504.49
NetR8_1: R8.1 U3.1 | length 301.2
  Top Layer w8: U3.1 240.05,789.18 265.82,789.18 280,775 280,696 320,656 320,556.68 307.27,543.94 R8.1
NetR9_2: R9.2 U3.5 | length 125.9
  Top Layer w8: R9.2 300,883.51 353.37,830.14 353.37,816.55 353.37,794.72 349.06,790.41 U3.5
nRST: R3.1 U1.7 | length 517.5
  Top Layer w8: U1.7@785.45,859.84 785.61,860 880,860 922,902 922,1041.47 962.53,1082 988,1082 1020,1114 1048.53,1114 1095.53,1161 R3.1
OLED_CS#: JP1.6 U1.21 | length 233.4
  Top Layer w8: JP1.6@445.02,1147.94 464.06,1147.94 517,1095 557,1095 592.06,1059.94 U1.21
OLED_D0: JP1.1 U1.11 | length 317.7
  Top Layer w8: U1.11@785.45,938.58 857.58,938.58 874,955 874,1076.93 JP1.1@945.02,1147.94
OLED_D1: JP1.3 U1.17 | length 178.4
  Top Layer w8: U1.17 670.8,1080.35 740.45,1150 JP1.3
OLED_DC: JP1.5 U1.19 | length 173.7
  Top Layer w8: JP1.5 550,1140.96 631.43,1059.53 U1.19
OLED_Flash_CS: JP3.1 U1.26 | length 1358.2
  Top Layer w8: U1.26 v1(649.84,938.12)
  Bottom Layer w8: v1@649.84,938.57 703.67,938.57 919.93,941.64 923.31,941.69 1324.02,540.98 1324.02,295.02 1253.85,224.85 JP3.1
OLED_MI: JP1.2 U1.16 | length 245
  Top Layer w8: U1.16@691.05,1010.57 U1.16 690.48,1067.85 725.57,1102.94 800.01,1102.94 JP1.2@844.02,1146.94
OLED_RST: JP1.4 U1.18 | length 140.5
  Top Layer w8: JP1.4 651.11,1148.89 U1.18
OLED_SCL: JP3.3 R2.1 U1.45 U2.13 U5.1 | length 1105.3
  Top Layer w8: U1.45 690.48,620.52 v1(706,605) ; R2.1@830.02,506.43 842.41,494.03 853.04,494.03 v1(892.07,455) ; U2.13 913.78,361.94 v1@982.51,361.94 ; v1(986.02,406.99) v1@986.02,365.45 ; JP3.3@1039.09,235.91 JP3.3 ; U5.1 1151.81,431.87 1153.32,430.35 v1(1153.32,395.64) ; v1@982.51,361.94 v1(986.02,361.94) ; v1@982.51,361.94 v1@986.02,365.45 ; v1@982.51,361.94 v1(986.02,361.94) ; v1(986.02,361.94) v1@986.02,365.45
  Bottom Layer w8: v1(706,605) 705,604 705,570 780,495 854.13,495 892.07,457.07 v1@892.07,456 ; v1@894.74,454.51 942.25,407 986.02,407 1141.96,407 v1(1153.32,395.64) ; v1@985,362 1035,362 1058,339 1058,233 JP3.3
OLED_SDA: JP3.2 R1.1 U1.46 U2.14 U5.11 | length 924.3
  Top Layer w8: U1.46 710.17,630.83 734,607 734,540.71 758.27,516.44 R1.1@769.02,505.7 ; R1.1@769.02,504.7 769.02,496.19 770,495.21 v1(770,464) ; U2.14 957.97,381.68 v1(960.32,384.02) ; U5.11 1107.84,426.43 1107.84,402.16 v1(1145,365)
  Bottom Layer w8: v1@770,465 849.96,465 929.96,385 959.34,385 v1(960.32,384.02) ; v1@965,385 1125,385 1146.53,363.47 JP3.2@1146.53,227.46
OSC32_IN: C3.1 U1.3 X2.1 | length 336.8
  Top Layer w8: U1.3@785.45,781.1 858.9,781.1 935,705 935,665.04 X2.1 950.91,655.04 988.52,617.43 988.52,592.94 999.52,581.94 C3.1
OSC32_OUT: C4.1 U1.4 X2.2 | length 481.3
  Top Layer w8: U1.4@785.45,800.79 929.17,800.79 X2.2 950.91,784.96 1008,727.87 1008,662.16 1039,631.16 1039,563.43 1004.52,528.94 C4.1
OSC_IN: C8.2 U1.5 X1.1 | length 481.3
  Top Layer w8: U1.5@785.45,820.47 894.47,820.47 984,910 1078.94,910 1127,958.06 X1.1 1141,976 C8.2
OSC_OUT: C9.2 U1.6 X1.3 | length 386.3
  Top Layer w8: U1.6@785.61,840.16 885.61,840.16 975,929.54 C9.2 975,978.5 1030.35,1033.85 1030.35,1041.35 X1.3 ; U1.6@801.72,839.55 U1.6@801.87,839.71
RX1: pad.2@86,990 U1.31 | length 684.3
  Top Layer w8: U1.31 550.71,839.71 577.95,866.95 577.95,878.95 v1(578,879)
  Bottom Layer w8: pad.2@86,990 86,945.96 152.96,879 v1(578,879)
SWCLK: U1.37 USB1.3 | length 607
  Top Layer w8: v1(149,462) 149.89,462 161.55,473.66 USB1.3 ; v1(498.27,713.55) 530.61,713.55 531.61,714.55 533,713.17 U1.37
  Bottom Layer w8: v1(149,462) 180.63,462 334.02,615.39 334.02,645.59 402.42,714 v1@498.27,714
SWDIO: U1.34 USB1.2 | length 702.9
  Top Layer w8: v1(144,487) 156.63,499.63 USB1.2@217.79,499.63 ; U1.34 481.08,780.39 545.9,780.39 v1(546.17,780.13)
  Bottom Layer w8: v1(144,487) 183,487 314.5,618.5 314.5,676.43 419.17,781.1 545.19,781.1 v1(546.17,780.13)
TX1: pad.2@85,1080 U1.30 | length 694.4
  Top Layer w8: U1.30 535.39,859.39 556,880 v1(556,900)
  Bottom Layer w8: pad.2@85,1080 133.5,1031.5 133.5,954.5 188,900 v1(556,900)
VBAT: D1.1 E2.1 K1.3 pad.2@86.11,821.54 U3.3 | length 1826.1
  Top Layer w15: v1(86.11,821.54) 93.57,829 150.5,829 K1.3 ; U3.3@244.8,711.3 213.06,711.3 v1(204.7,702.94) 260.96,646.68 260.96,641.07 E2.1 ; v1(1028.06,301.94) 1029.95,301.94 D1.1
  Bottom Layer w15: v1(204.7,702.94) v1(86.11,821.54) 45.95,781.37 ccw(c113.38,713.94) 18.02,713.94 18.02,536.37 ccw(c118.02,536.37) 47.3,465.65 196.17,316.79 ccw(c232.01,352.64) 232.01,301.94 v1(1028.06,301.94)
vbat_det: R6.1 R7.2 U1.15 | length 652.3
  Top Layer w8: R6.1 R7.2 240,883.51 v1(283.51,840) ; v1(602.49,846.41) 710.17,954.09 U1.15
  Bottom Layer w8: v1(283.51,840) 596.08,840 v1(602.49,846.41)
pads on no net: B1.3 K1.0 SW1.0 SW2.0 SW3.0 U1.2 U1.22 U1.27 U1.28 U1.29 U2.10 U2.11 U5.7 U5.8 U6.1 U6.4 U6.6 U6.7 U6.9 U6.10 U6.12 U6.13 USB1.4

## Polygon pours and split planes (outlines as drawn)
GND on Top Layer "Top Layer-No Net" (solid, remove dead copper, pour order 20): 29.92,195.84 248.23,28.94 ccw(c340,160) 340,0 1060,0 ccw(c1060,160) 1151.77,28.94 1369.64,194.89 ccw(c1315,260) 1400,260 1400,1115 ccw(c1315,1115) 1369.64,1180.11 1151.77,1346.06 ccw(c1060,1215) 1060,1375 340,1375 ccw(c340,1215) 248.23,1346.06 30.36,1180.11 ccw(c85,1115) 0,1115 0,260 ccw(c83.76,260)
GND on Bottom Layer "Bottom Layer-No Net" (solid, pour order 21): 29.92,195.84 248.23,28.94 ccw(c340,160) 340,0 1060,0 ccw(c1060,160) 1151.77,28.94 1369.64,194.89 ccw(c1315,260) 1400,260 1400,1115 ccw(c1315,1115) 1369.64,1180.11 1151.77,1346.06 ccw(c1060,1215) 1060,1375 340,1375 ccw(c340,1215) 248.23,1346.06 30.36,1180.11 ccw(c85,1115) 0,1115 0,260 ccw(c83.76,260)

## Other copper
Top Layer:
  pour cut-out: 1296.67,913.5 1444,913.5 1444,540.5 1295.43,540.5
Bottom Layer:
  pour cut-out: 1297.67,913 1424,913 1424,540 1296.43,540

## Silkscreen, mask and mechanical layers (free items; w line width, h text height)
Bottom Overlay:
  text "TX" at 45.02,1071.94 h15
  text "RX" at 45.02,975.94 h15
  text "N-watch" at 950,892 h100
  text "+" at 40.02,808.94 h20
  text "V3.1" at 783,791 h80
  text "-" at 40.02,704.94 h20
  text "Updated By XiaoYang / Have a good day!" at 989,654.25 h50
  text "20250816" at 819.06,591.67 h60
  text "XY & Vanilla_2" at 882,520.66 h60
Mechanical 1:
  lines w5: 809.02,0.02 1060.33,0.02 ; 0,260 ccw(c83.76,260) 29.92,195.84 248.23,28.94 ccw(c340,160) 340,0 1060,0 ccw(c1060,160) 1151.77,28.94 1369.64,194.89 ccw(c1315,260) 1400,260 1400,1115 ccw(c1315,1115) 1369.64,1180.11 1151.77,1346.06 ccw(c1060,1215) 1060,1375 340,1375 ccw(c340,1215) 248.23,1346.06 30.36,1180.11 ccw(c85,1115) 0,1115 0,260
  lines w8: 326.02,83.26 cw(c326.02,122.63) 326.02,162 1074.05,162 cw(c1074.05,122.63) 1074.05,83.26 326.02,83.26 ; 326.02,1205.57 cw(c326.02,1244.94) 326.02,1284.31 1074.05,1284.31 cw(c1074.05,1244.94) 1074.05,1205.57 326.02,1205.57